# EAGLE board lm3410-sepic-led-driver-17mm-mk-2 (EAGLE 6.4)
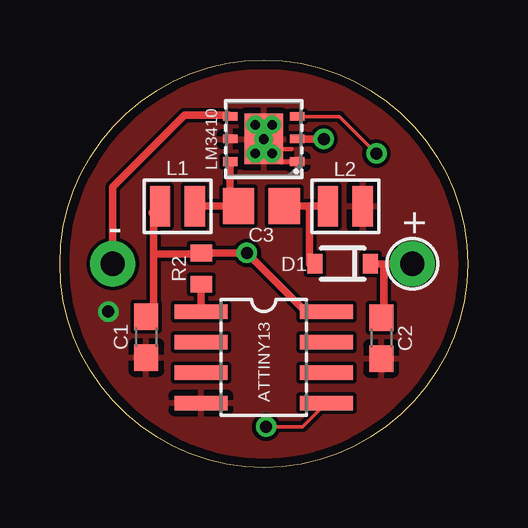
[diagram p0: board, top side]
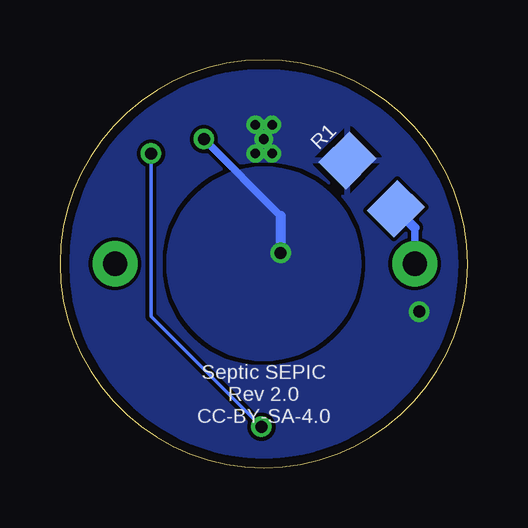
[diagram p1: board, bottom side, seen from below]

Size 17 x 17 mm. Coordinates in mm from the lower left corner, seen from the top.
Outline: 8.5,0 arc-90 0,8.5 arc-90 8.5,17 arc-90 17,8.5 arc-90 8.5,0
Copper layers (1*16): Top 0.0356mm / dielectric 1.5011mm / Bottom 0.0356mm
Design rules "LaenPCBOrder_2": minimum track width 6mil, minimum drill 13mil, track to track 6mil, track to pad 6mil, pad to pad 6mil, via to via 6mil, smd to smd 6mil, copper to edge 15mil, drill to drill 6mil, minimum pad ring 7mil, minimum via ring 7mil, stop-mask expansion 3mil, vias tented up to drill 20mil, thermal gap 10mil

## Footprints (pad centres in the part's own frame; a part is rotated, then mirrored left to right if it is on the bottom)
1X01-KIT = drill 1.016 pad 1.88: 1 0,0
1X01NS-KIT = drill 1.016 pad 1.88: 1 0,0
C0603 = smd 1.1 x 1: 1 -0.85,0; 2 0.85,0
C0805 = smd 1.3 x 1.5: 1 -0.95,0; 2 0.95,0
SOD-323 = smd 0.63 x 0.83: A 1.15,0; C -1.15,0
SO08 = smd 0.61 x 2.21: 1 -1.905,-2.616; 2 -0.635,-2.616; 3 0.635,-2.616; 4 1.905,-2.616; 5 1.905,2.616; 6 0.635,2.616; 7 -0.635,2.616; 8 -1.905,2.616
1X01_NOSILK_NOSTOP = drill 0.5: P$1 0,0
INDUCTOR_2X1.6MM = smd 0.85 x 1.7: P$1 -0.725,0; P$2 0.725,0
DFN300X300X80-7N = smd 0.61 x 0.356: 1 -1.397,0.94; 2 -1.397,0; 3 -1.397,-0.94; 4 1.397,-0.94; 5 1.397,0; 6 1.397,0.94 | smd 1.6 x 2.108: 7 0,0 | drill 0.4: 7@1 -0.35,0.6; 7@2 0.35,0.6; 7@3 -0.35,-0.6; 7@4 0.35,-0.6; 7@5 0,0
R1206 = smd 1.6 x 1.803: 1 -1.422,0; 2 1.422,0
R0402 = smd 0.7 x 0.9: 1 -0.65,0; 2 0.65,0

## Placement (x,y rotation side)
+  M01PTH-KIT  [1X01-KIT]  14.7,8.5 0 top
-  M01NOSILK-KIT  [1X01NS-KIT]  2.2,8.5 180 top
C1  10uF  [C0603]  3.6,5.44 270 top
C2  10uF  [C0603]  13.4,5.4 270 top
C3  2.2uF  [C0805]  8.4,10.9 0 top
D1  BAT20J  [SOD-323]  11.79,8.5 180 top
IC2  ATTINY13  [SO08]  8.5,4.6 270 top
JBATT+  M01NOT-A-VIA-NOPE  [1X01_NOSILK_NOSTOP]  7.8,8.95 0 bottom
JBATT-  M01NOT-A-VIA-NOPE  [1X01_NOSILK_NOSTOP]  2.02,6.5 0 top
L1  4.7uH  [INDUCTOR_2X1.6MM]  4.9,10.9 0 top
L2  4.7uH  [INDUCTOR_2X1.6MM]  11.9,10.9 0 top
LM3410  LM3410XSD  [DFN300X300X80-7N]  8.5,13.7 180 top
R1  0.68  [R1206]  4,11.8 315 bottom
R2  100k  [R0402]  5.9,8.3 90 top

## Library data of the parts
+ - C1-C3 IC2 JBATT+ JBATT- L1 L2 R1 R2 = A_butts
D1 = A_butts; PROD_ID: DIO-11623
LM3410 = A_butts; MPN: LM3410XSD; OC_FARNELL: -; OC_NEWARK: 11N9218; PACKAGE: DFN-6; SUPPLIER: National Semiconductor

## Nets
D0: IC2.5 LM3410.3
GND: C1.2 C2.2 IC2.4 JBATT-.P$1 L2.P$2 LM3410.1 LM3410.5 LM3410.7 LM3410.7@1 LM3410.7@2 LM3410.7@3 LM3410.7@4 LM3410.7@5 R1.1
LED_ANODE: +.1 C2.1 D1.C
N$1: C3.2 D1.A L2.P$1
N$3: IC2.1 R2.1
N$6: -.1 LM3410.4 R1.2
SW: C3.1 L1.P$2 LM3410.6
V_BATT+: C1.1 IC2.8 JBATT+.P$1 L1.P$1 LM3410.2 R2.2

## Tracks (layer width: path | path; a pad name or v marks a point on that pad's centre or on a via)
D0  (via drill 0.5)
  Top 0.152: IC2.5 10.12,1.7 v8.6,1.7 | v13.2,13.1 11.66,14.64 LM3410.3
  Bottom 0.152: v8.6,1.7 13.2,6.3 v13.2,13.1
GND
  Top 0.18: 9.65,13.28 9.15,13.28 | 9.95,12.76 8.85,12.76
  pour Bottom (rank 6): 17,8.5 arc-90 8.5,0 arc-90 0,8.5 arc-90 8.5,17 arc-90
  pour Top: 17,8.5 arc-90 8.5,0 arc-90 0,8.5 arc-90 8.5,17 arc-90
LED_ANODE
  Top 0.305: D1.C 13.5,8.5 | 13.5,8.5 +.1 | 13.5,6.35 13.5,8.5
  Top 0.406: C2.1 13.5,6.35
N$1
  Top 0.305: C3.2 10.4,10.9 | 10.4,10.9 L2.P$1 | D1.A 10.4,8.5 10.4,10.9
N$3
  Top 0.305: 5.88,7.63 IC2.1
  Top 0.406: R2.1 5.88,7.63
N$6
  Top 0.305: LM3410.4 7.04,14.7 5.2,14.7 2.2,11.7 -.1
  Bottom 0.305: 2.2,10 -.1
  Bottom 0.406: R1.2 2.2,10
SW
  Top 0.305: LM3410.6 7.1,11.25 | L1.P$2 C3.1
  Top 0.406: 7.1,11.25 C3.1
V_BATT+  (via drill 0.5)
  Top 0.305: 3.9,6.5 3.9,8.9 | 3.9,8.9 3.9,10.62 | 5.85,8.9 3.9,8.9 | LM3410.2 v11,13.7 | R2.2 JBATT+.P$1 10.2,6.55
  Top 0.406: IC2.8 10.64,6.5 10.6,6.55 10.2,6.55 | L1.P$1 3.9,10.62 | C1.1 3.81,6.5 3.9,6.5 | R2.2 5.85,8.9
  Bottom 0.305: v11,13.7 7.8,10.5
  Bottom 0.406: 7.8,10.5 JBATT+.P$1
  pour Bottom: 4.5,8.5 arc90 8.5,4.5 arc90 12.5,8.5 arc90 8.5,12.5 arc90

## Text on the board
bPlace: Septic SEPIC / Rev 2.0 / CC-BY-SA-4.0